# Altium PCB PCB1.PcbDoc
Units mm, origin at the board's own origin, x right, y up, seen from the top; angles counter-clockwise.
Board outline 95 x 31 mm, 2 copper layers (Top Layer, Bottom Layer); 24 components, 26 nets, 79 pads, 5 vias.
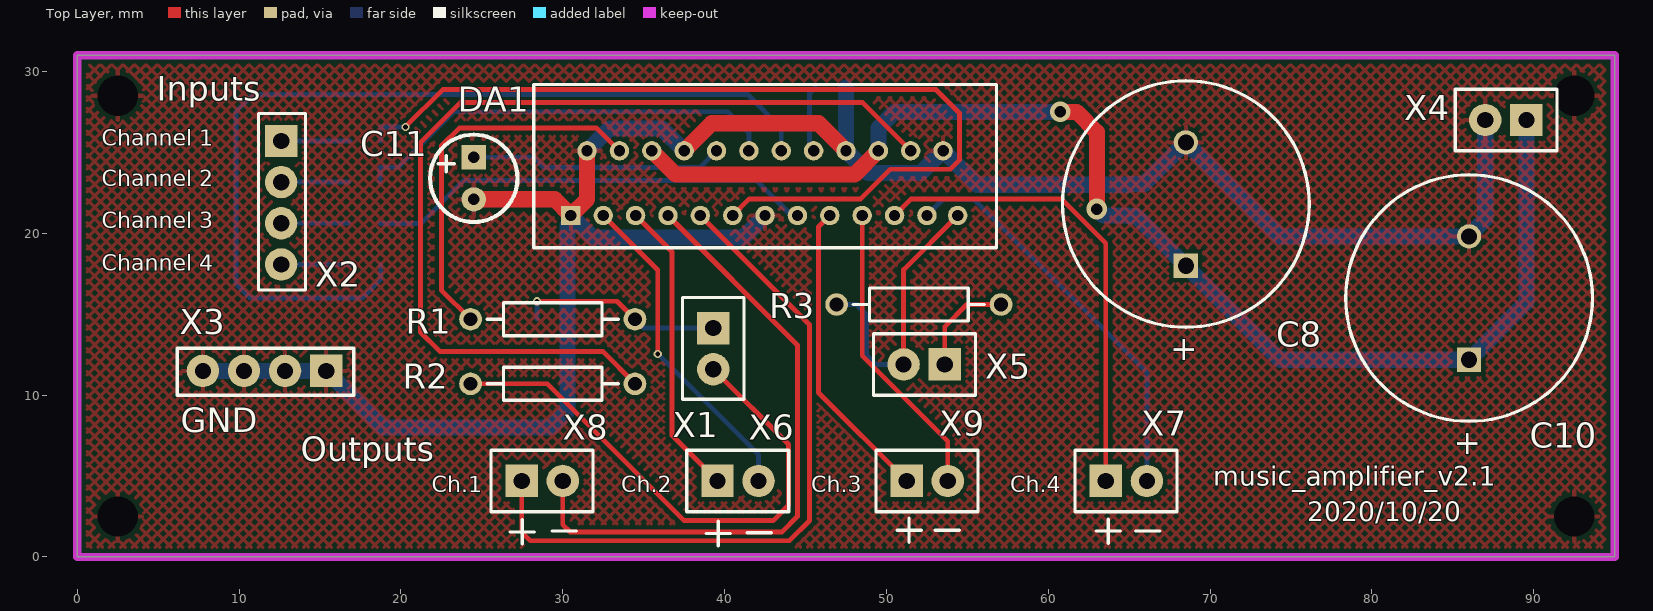
[diagram p0: Top Layer view]
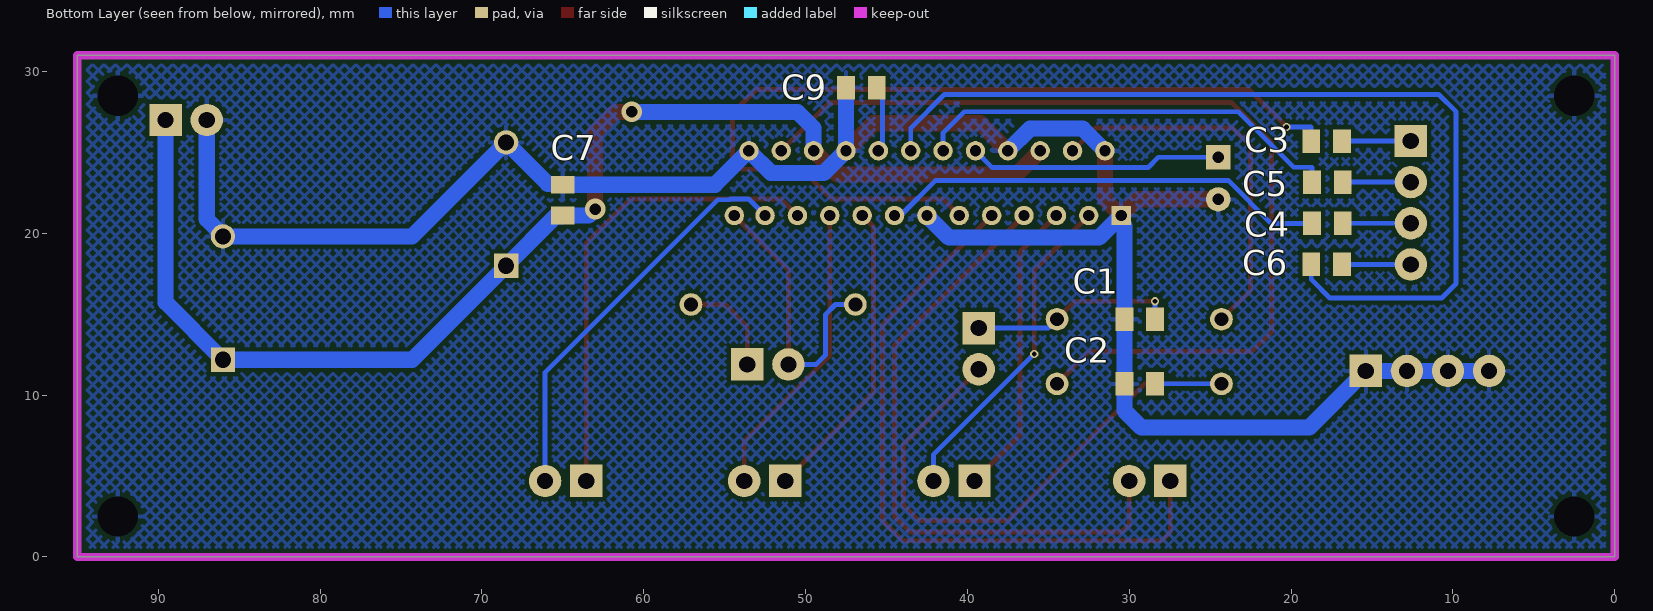
[diagram p1: Bottom Layer view, seen from below]

## Layer stack, top to bottom
Top Solder: solder mask 0.0102, Solder Resist, Dk 3.5
Top Layer: signal copper 0.0356
Dielectric 1: dielectric 0.32, FR-4, Dk 4.8
Bottom Layer: signal copper 0.0356
Bottom Solder: solder mask 0.0102, Solder Resist, Dk 3.5

## Board outline
0,0 0,31 95,31 95,0

## Design rules (kind name [scope] priority, off if disabled: settings)
Clearance [All] p1: gap=0.254 ignorepadtopadclearanceinfootprint=FALSE except(0: Arc-Hole Track-Hole SMDPad-Hole THPad-Hole Via-Hole Fill-Hole Poly-Hole Region-Hole Text-Hole)
PlaneClearance [All] p1: clearance=1
PlaneConnect [All] p1: planeconnectstyle=Relief reliefexpansion=0.508 reliefentries=4 reliefconductorwidth=0.254 reliefairgap=0.5
PolygonConnect [All] p1: connectstyle=Relief reliefconductorwidth=0.254 reliefentries=4 polygonreliefangle="90 Angle" airgapwidth=0.254
RoutingVias [All] p1: holewidth=0.3 width=0.5 viastyle="Through Hole" minholewidth=0.3 minwidth=0.5 maxholewidth=1 maxwidth=1.5
SolderMaskExpansion [All] p1: expansion=0.102
Width Width_Power [InNet('+12') OR InNet('GND')] p1: maxlimit=2 minlimit=0.2 preferedwidth=1 minimp=50.000000 maximp=50.000000 favimp=50.000000
Width [All] p2: maxlimit=0.5 minlimit=0.2 preferedwidth=0.3 minimp=50.000000 maximp=50.000000 favimp=50.000000
28 further rules are at their usual default settings.

## Components (designator, comment, footprint, x,y, rotation, side; value= is the part's Value field where it differs from the comment)
C1 "Cap" "Capacitor SMD 0805" 29.35,14.69 r0 bottom value=1u
C2 "Cap" "Capacitor SMD 0805" 29.35,10.7 r0 bottom value=1u
C3 "Cap" "Capacitor SMD 0805" 17.8,25.7 r180 bottom value=0.1u
C4 "Cap" "Capacitor SMD 0805" 17.75,20.62 r180 bottom value=0.1u
C5 "Cap" "Capacitor SMD 0805" 17.75,23.16 r180 bottom value=0.1u
C6 "Cap" "Capacitor SMD 0805" 17.8,18.08 r180 bottom value=0.1u
C7 "Cap" "Capacitor SMD 0805" 65,22.05 r270 bottom value=0.1u
C8 "Cap Pol1" RB7.6-15 68.5,21.81 r270 top value=4700u
C9 "Cap" "Capacitor SMD 0805" 46.55,29 r180 bottom value=0.47u
C10 "Cap Pol1" RB7.6-15 86,16 r270 top value=4700u
C11 "Cap Polar" "Capacitor Polar Round 5mm" 24.5,23.4 r90 top value=47u
DA1 "TDA7851L" "TDA7851L (Flexiwatt25)" 30.5,21.1 r0 top
R1 "Res2" AXIAL-0.4 29.38,14.69 r180 top value=10k
R2 "Res2" AXIAL-0.4 29.38,10.7 r0 top value=47k
R3 "Res2" AXIAL-0.4 52,15.6 r0 top value=47k
X1 "Header 2L" "Header 2" 39.3,14.14 r270 top
X2 "Header 4R" "Header 4" 12.6,25.7 r270 top
X3 "Header 4R" "Header 4" 15.38,11.5 r180 top
X4 "Header 2L" "Header 2" 89.54,27 r180 top
X5 "Header 2R" "Header 2" 53.6,11.9 r180 top
X6 "Header 2R" "Header 2" 39.56,4.7 r0 top
X7 "Header 2R" "Header 2" 63.55,4.7 r0 top
X8 "Header 2R" "Header 2" 27.46,4.7 r0 top
X9 "Header 2R" "Header 2" 51.25,4.7 r0 top

## Footprints (in the part's own frame and the unit in brackets; to place one, negate y for a bottom-side part, rotate by r counter-clockwise, add the part's x,y. Pads: shape width x height; smd on the part's side, far side on the other; paste and mask are expansions set on the pad)
AXIAL-0.4 [mm] "Axial Device, Thru-Hole; 2 Leads; 0.4 in Pin Spacing"
  round 1.4 hole 0.85: 1(-5.08,0) 2(5.08,0)
  silkscreen extent -4.06,-1.02 4.06,1.02
"Capacitor Polar Round 5mm" [mm]
  rect 1.5x1.5 hole 0.7: 1(1.3,0)
  round 1.5 hole 0.7: 2(-1.3,0)
  silkscreen extent -2.7,-2.7 2.7,2.7
"Capacitor SMD 0805" [mm] "Chip Capacitor, 2-Leads, Body 2,10x1,30mm, IPC Medium Density"
  rect 1.1x1.45 smd: 1(-0.95,0) 2(0.95,0)
  body extent -1.1,-0.7 1.1,0.7, height 0.55
"Header 2" [mm]
  rect 2x2 hole 1: 1(0,0)
  round 2 hole 1: 2(2.54,0)
  silkscreen extent -1.9,-1.9 4.4,1.9
"Header 4" [mm]
  rect 2x2 hole 1: 1(0,0)
  round 2 hole 1: 2(2.54,0) 3(5.08,0) 4(7.62,0)
  silkscreen extent -1.7,-1.4 9.2,1.5
RB7.6-15 [mm] "Polarized Capacitor (Radial); 2 Leads"
  rect 1.5x1.5 hole 1: 1(3.81,0)
  round 1.5 hole 1: 2(-3.81,0)
  silkscreen extent -7.62,-7.62 7.62,7.62
"TDA7851L (Flexiwatt25)" [mm]
  rect 1.2x1.2 hole 0.7: 1(0,0)
  round 1.2 hole 0.7: 2(1,4) 3(2,0) 4(3,4) 5(4,0) 6(5,4) 7(6,0) 8(7,4) 9(8,0) 10(9,4) 11(10,0) 12(11,4) 13(12,0) 14(13,4) 15(14,0) 16(15,4) 17(16,0) 18(17,4) 19(18,0) 20(19,4) 21(20,0) 22(21,4) 23(22,0) 24(23,4) 25(23.9,0)
  silkscreen extent -2.3,-2 26.3,8.1

## Part data
C8 C10: "Polarized Capacitor (Radial)", LatestRevisionDate=17-Jul-2002, LatestRevisionNote="Re-released for DXP Platform.", PackageDescription="Polarized Capacitor (Radial); 2 Leads", PackageReference=RB7.6-15, Published=8-Jun-2000, Publisher="Altium Limited"
C11: Voltage=16V
R1 R2 R3: "Resistor", LatestRevisionDate=17-Jul-2002, LatestRevisionNote="Re-released for DXP Platform.", PackageDescription="Axial Device, Thru-Hole; 2 Leads; 0.4 in Pin Spacing", PackageReference=AXIAL-0.4, Published=8-Jun-2000, Publisher="Altium Limited"

## Free pads (board coordinates)
  round 0 hole 2.5: 2(92.5,2.5) 3(2.5,28.5) 4(2.5,2.5) 5(92.5,28.5)

## Via types
v1: diameter 0.5, hole 0.3, Top Layer to Bottom Layer, 3 vias
v2: diameter 1.27, hole 0.711, Top Layer to Bottom Layer, 2 vias

## Nets (pads, with @x,y where several pads share a name; then routed paths per layer and width w, separated by ;. In a path a pad name is that pad's centre, name@x,y a point inside that pad or via, vN(x,y) a via of type N, cw(c..) or ccw(c..) an arc to the next point about the centre after c; other vN are vias at no path point)
+12: C7.2 C8.1 C10.1 DA1.6 DA1.20 X4.1 | length 78.9
  Top Layer w1: DA1.6 36.975,23.625 48.025,23.625 DA1.20 ; v2(60.75,27.5) 61.75,27.5 63,26.25 v2(63,21.5)
  Bottom Layer w1: DA1.20 49.5,26.5 50.5,27.5 v2(60.75,27.5) ; v2(63,21.5) 63.4,21.1 C7.2 65.05,21.05 65.45,21.05 C8.1 74.31,12.19 C10.1 89.54,15.73 X4.1
GND: C1.2 C2.2 C7.1 C8.2 C9.1 C10.2 C11.2 DA1.1 DA1.2 DA1.8 DA1.13 DA1.18 DA1.24 pad.2 pad.3 pad.4 pad.5 X3.1 X3.2 X3.3 X3.4 X4.2 | length 134.6
  Top Layer w1: C11.2 29.5,22.1 DA1.1 31.5,22.1 DA1.2 ; DA1.8 39.2,26.8 45.8,26.8 DA1.18
  Bottom Layer w1: X3.4 X3.3 X3.2 X3.1 18.88,8 29.25,8 30.3,9.05 C2.2 C1.2 30.3,20.5 30.5,20.7 DA1.1 31.861,19.739 41.139,19.739 DA1.13 ; DA1.2 32.87,26.47 36.13,26.47 DA1.8 ; C9.1 DA1.18 48.873,23.727 52.127,23.727 DA1.24 55.6,23 C7.1 65.05,23.05 65.93,23.05 C8.2 74.31,19.81 C10.2 86,19.864 87,20.864 X4.2
NetC1_1: C1.1 R1.1 X1.1 | length 12.7
  Top Layer w0.3: v1(28.4,15.802) 33.348,15.802 R1.1
  Bottom Layer w0.3: C1.1 v1(28.4,15.802) ; R1.1 35.01,14.14 X1.1
NetC2_1: C2.1 R2.1 X1.2 | length 38
  Top Layer w0.3: R2.1 29.05,10.7 37.5,2.25 43,2.25 43.946,3.196 43.946,6.954 X1.2
  Bottom Layer w0.3: R2.1 C2.1
NetC3_1: C3.1 DA1.11 | length 56.5
  Top Layer w0.3: v1(20.272,26.571) 22.583,28.883 53.063,28.883 54.511,27.435 54.511,24.514 53.952,23.955 50.244,23.955 48.415,22.126 41.526,22.126 DA1.11
  Bottom Layer w0.3: C3.1 18.75,26.571 v1(20.272,26.571)
NetC3_2: C3.2 X2.1 | length 4.3
  Bottom Layer w0.3: X2.1 C3.2
NetC4_1: C4.1 DA1.15 | length 27.8
  Bottom Layer w0.3: C4.1 18.7,20.602 21.211,20.602 23.878,23.269 41.963,23.269 44.133,21.1 DA1.15
NetC4_2: C4.2 X2.3 | length 4.2
  Bottom Layer w0.3: X2.3 C4.2
NetC5_1: C5.1 DA1.12 | length 26.8
  Bottom Layer w0.3: C5.1 18.7,24.082 19.84,24.082 23.269,27.511 40.19,27.511 41.5,26.201 DA1.12
NetC5_2: C5.2 X2.2 | length 4.2
  Bottom Layer w0.3: X2.2 C5.2
NetC6_1: C6.1 DA1.14 | length 57.7
  Bottom Layer w0.3: C6.1 18.75,17.148 17.602,16 10.7,16 9.8,16.9 9.8,27.5 10.878,28.578 41.422,28.578 43.5,26.5 DA1.14
NetC6_2: C6.2 X2.4 | length 4.3
  Bottom Layer w0.3: X2.4 C6.2
NetC9_2: C9.2 DA1.16 | length 4.1
  Bottom Layer w0.3: DA1.16 45.25,25.35 45.25,28.65 C9.2
NetC11_1: C11.1 DA1.10 | length 15.7
  Bottom Layer w0.3: C11.1 28.196,24.7 28.84,24.057 38.457,24.057 DA1.10
NetDA1_3: DA1.3 X6.2 | length 20.4
  Top Layer w0.3: DA1.3 35.867,17.733 v1(35.867,12.551)
  Bottom Layer w0.3: v1(35.867,12.551) 42.1,6.318 X6.2
NetDA1_4: DA1.4 R1.2 | length 23.5
  Top Layer w0.3: R1.2 22.5,16.49 22.5,25.4 23.6,26.5 32.1,26.5 DA1.4
NetDA1_5: DA1.5 X6.1 | length 18.5
  Top Layer w0.3: DA1.5 36.756,18.844 36.756,7.504 X6.1
NetDA1_7: DA1.7 X8.2 | length 39.7
  Top Layer w0.3: X8.2 30,2 30.446,1.554 43.554,1.554 44.5,2.5 44.5,13.1 DA1.7
NetDA1_9: DA1.9 X8.1 | length 43.3
  Top Layer w0.3: X8.1 27.46,1.54 28,1 44,1 45.245,2.245 45.245,14.355 DA1.9
NetDA1_17: DA1.17 X9.1 | length 18.9
  Top Layer w0.3: DA1.17 45.799,20.399 45.799,10.151 X9.1
NetDA1_19: DA1.19 X9.2 | length 18.6
  Top Layer w0.3: DA1.19 48.5,12.44 53.79,7.15 X9.2
NetDA1_21: DA1.21 X7.1 | length 29.3
  Top Layer w0.3: DA1.21 51.526,22.126 60.81,22.126 63.55,19.386 X7.1
NetDA1_22: DA1.22 R2.2 | length 58.8
  Top Layer w0.3: R2.2 32.457,12.703 22.397,12.703 21.2,13.9 21.2,25.6 23.675,28.075 48.525,28.075 DA1.22
NetDA1_23: DA1.23 X7.2 | length 25.2
  Bottom Layer w0.3: DA1.23 53.526,22.126 54.638,22.126 54.689,22.076 55.425,22.076 66.09,11.411 X7.2
NetDA1_25: DA1.25 R3.1 X5.2 | length 17.7
  Top Layer w0.3: X5.2 51.06,17.76 DA1.25
  Bottom Layer w0.3: R3.1 48.15,15.6 48.776,14.974 48.776,12.474 49.35,11.9 X5.2
NetR3_2: R3.2 X5.1 | length 6.4
  Top Layer w0.3: X5.1 53.6,14.232 54.968,15.6 R3.2

## Polygon pours and split planes (outlines as drawn)
GND on Top Layer "GND Top" (hatched 45Degree grid 0.5 track 0.2, remove dead copper, pour order 0): 0,0 0,31 95,31 95,0
GND on Bottom Layer "GND Bottom" (hatched 45Degree grid 0.5 track 0.2, remove dead copper, pour order 1): 0,0 0,31 95,31 95,0

## Keep-outs
Keep-Out Layer:
  the board outline again, w0.5

## Silkscreen, mask and mechanical layers (free items; w line width, h text height)
Top Overlay:
  lines w0.2: 26.75,1.55 28.25,1.55 ; 27.5,0.8 27.5,2.3 ; 29.35,1.6 30.85,1.6 ; 38.85,1.45 40.35,1.45 ; 39.6,0.7 39.6,2.2 ; 41.4,1.5 42.9,1.5 ; 50.65,1.65 52.15,1.65 ; 51.4,0.9 51.4,2.4 ; 53,1.65 54.5,1.65 ; 62.95,1.6 64.45,1.6 ; 63.7,0.85 63.7,2.35 ; 65.4,1.6 66.9,1.6
  text "Inputs" at 4.9,28.2 h1.5
  text "Channel 1" at 1.5,25.4 h1
  text "Channel 2" at 1.5,22.9 h1
  text "Channel 3" at 1.5,20.3 h1
  text "Channel 4" at 1.5,17.7 h1
  text "GND" at 6.4,7.7 h1.5
  text "Outputs" at 13.8,5.9 h1.5
  text "music_amplifier_v2.1" at 70.2,4.4 h1.2
  text "Ch.1" at 21.9,4 h1
  text "Ch.2" at 33.6,4 h1
  text "Ch.3" at 45.35,4 h1
  text "Ch.4" at 57.65,4 h1
  text "2020/10/20" at 76,2.2 h1.2
Mechanical 1:
  the board outline again, w0.2

## Text inside footprints (layer, text, board x,y; h text height)
C8: Top Overlay "+" at 67.763,13.678 h1.5 r270
C10: Top Overlay "+" at 85.263,7.868 h1.5 r270